# EAGLE board MatrixEscravo (EAGLE 6.5.0)
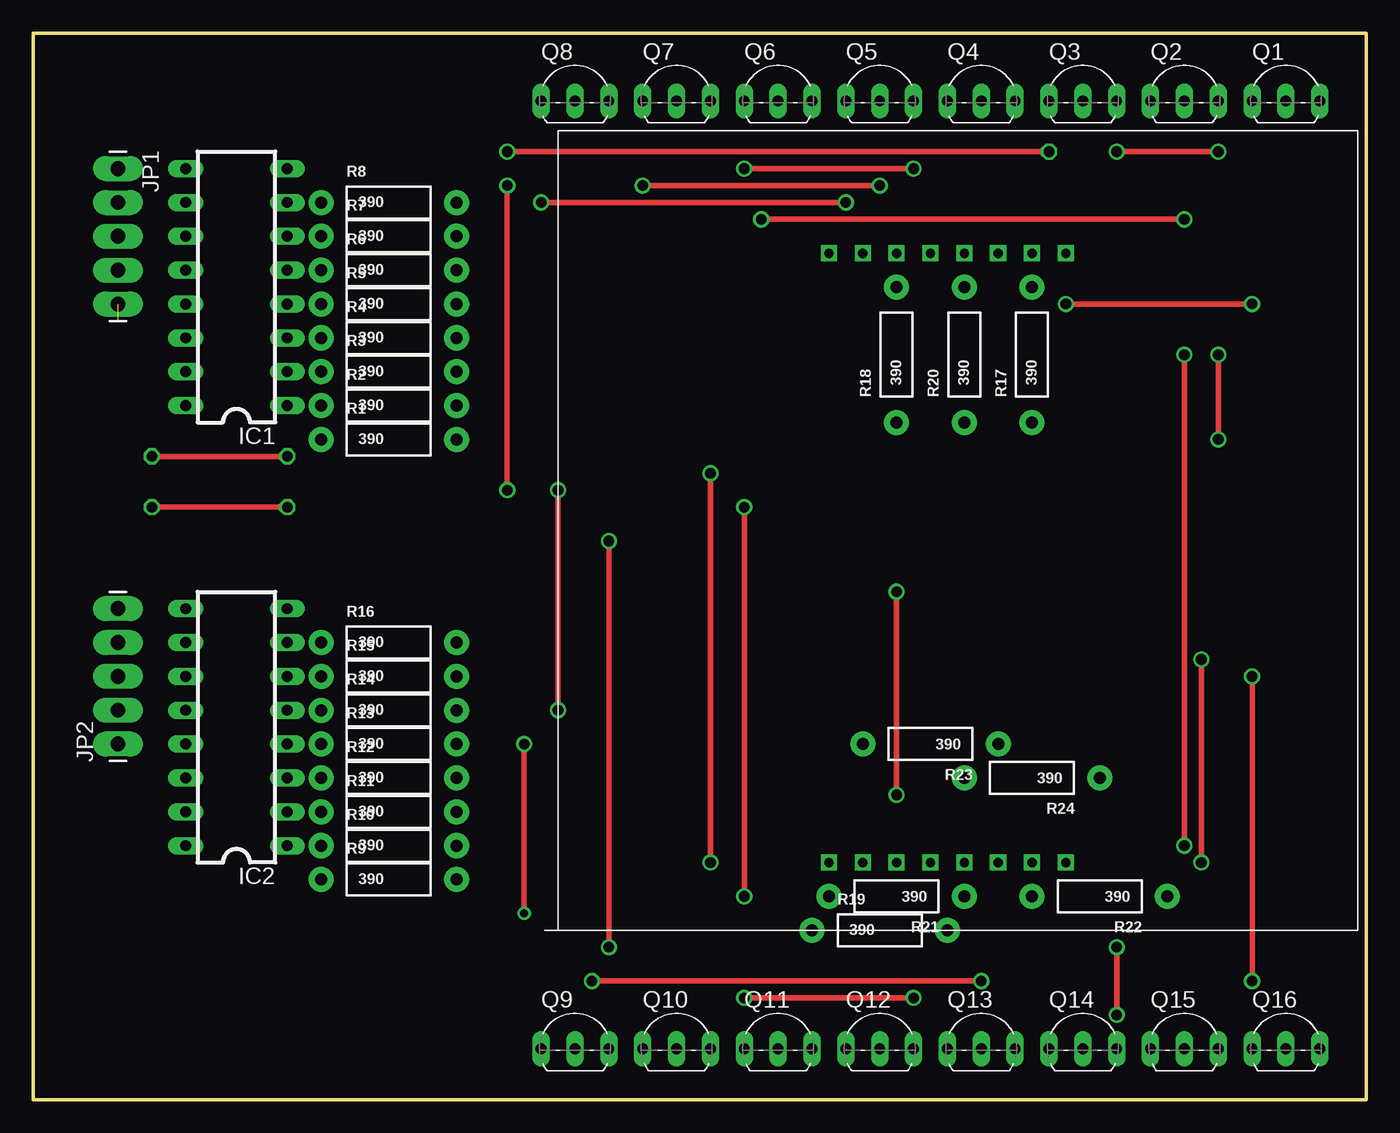
[diagram p0: board, top side]
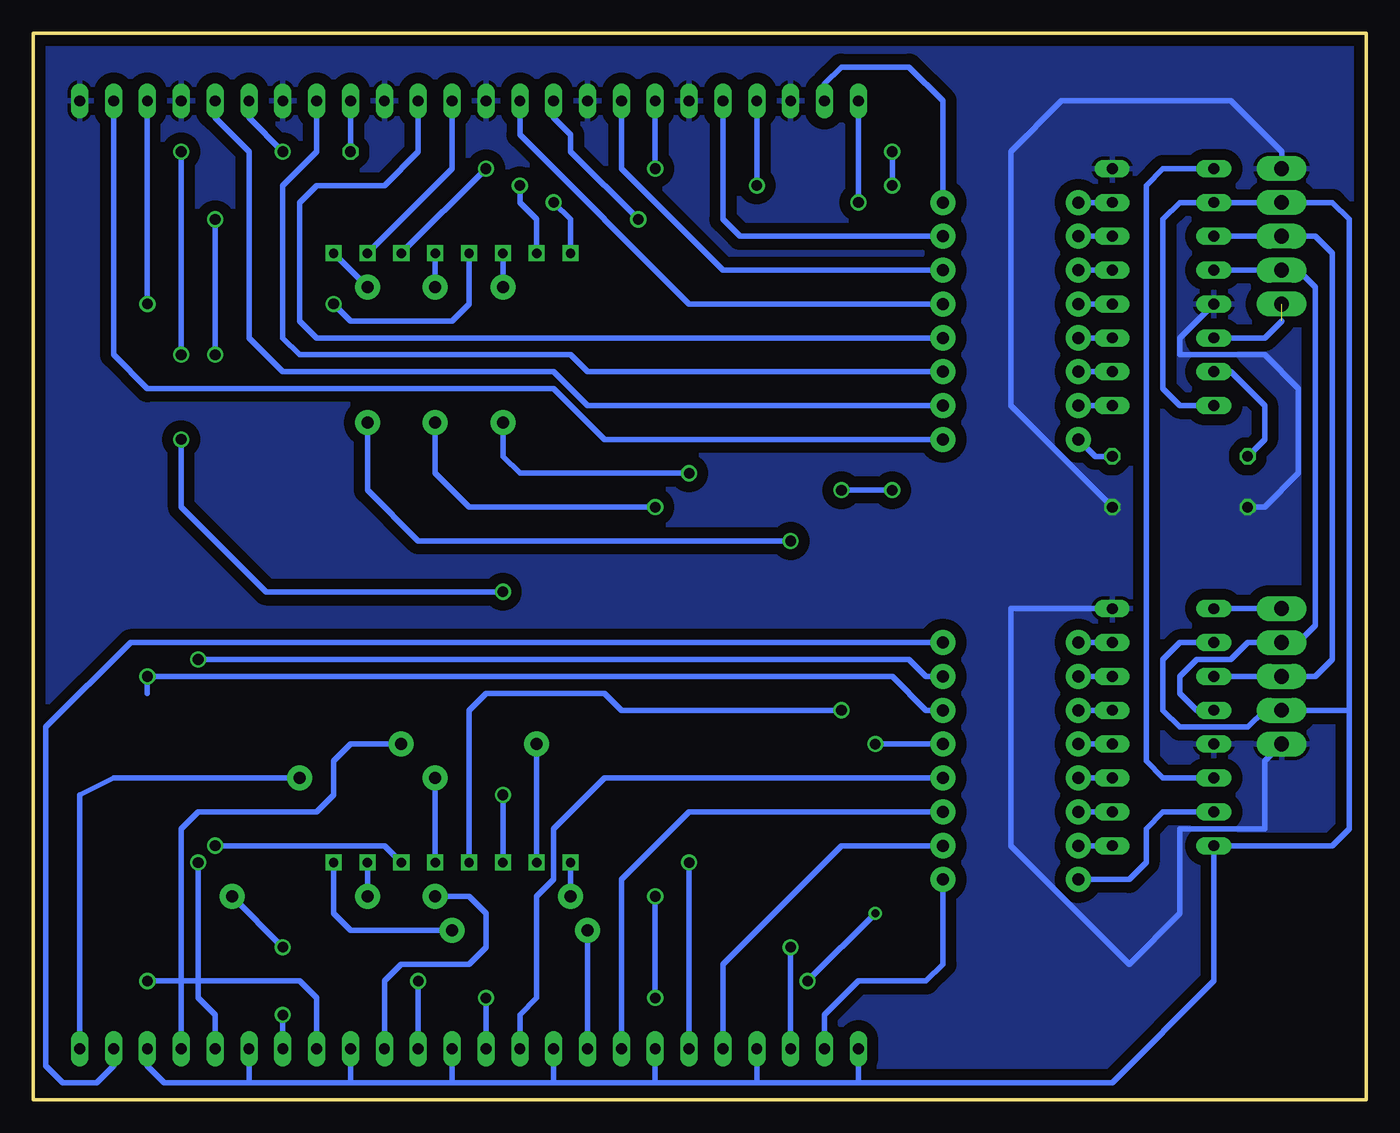
[diagram p1: board, bottom side, seen from below]

Size 100 x 80 mm. Coordinates in mm from the lower left corner, seen from the top.
Outline: 0,0 100,0 100,80 0,80 0,0
Copper layers (1*16): Top 0.035mm / dielectric 1.5mm / Bottom 0.035mm
Design rules "default *": minimum track width 10mil, minimum drill 24mil, track to track 8mil, track to pad 8mil, pad to pad 8mil, via to via 8mil, smd to smd 8mil, copper to edge 10mil, drill to drill 8mil, minimum pad ring 10mil, minimum via ring 8mil, stop-mask expansion 4mil, vias tented up to drill 0mil, thermal gap 10mil

## Footprints (pad centres in the part's own frame; a part is rotated, then mirrored left to right if it is on the bottom)
DIL16 = drill 0.813 long: 1 -8.89,-3.81; 2 -6.35,-3.81; 3 -3.81,-3.81; 4 -1.27,-3.81; 5 1.27,-3.81; 6 3.81,-3.81; 7 6.35,-3.81; 8 8.89,-3.81; 9 8.89,3.81; 10 6.35,3.81; 11 3.81,3.81; 12 1.27,3.81; 13 -1.27,3.81; 14 -3.81,3.81; 15 -6.35,3.81; 16 -8.89,3.81
1X05_LONGPADS = drill 1.118 pad 1.88 long: 1 0,0; 2 2.54,0; 3 5.08,0; 4 7.62,0; 5 10.16,0
TO92-EBC = drill 0.813 long: B 0,-1.27; C -2.54,-1.27; E 2.54,-1.27
AXIAL-0.4 = drill 0.9 pad 1.88: P$1 -5.08,0; P$2 5.08,0
HS2388 = drill 0.7 square: 1 20.32,5.08; 2 22.86,5.08; 3 25.4,5.08; 4 27.94,5.08; 5 30.48,5.08; 6 33.02,5.08; 7 35.56,5.08; 8 38.1,5.08; 9 38.1,50.8; 10 35.56,50.8; 11 33.02,50.8; 12 30.48,50.8; 13 27.94,50.8; 14 25.4,50.8; 15 22.86,50.8; 16 20.32,50.8

## Placement (x,y rotation side)
IC1  74LS595N  [DIL16]  15.24,60.96 90 top
IC2  74LS595N  [DIL16]  15.24,27.94 90 top
JP1  [1X05_LONGPADS]  6.35,69.85 270 top
JP2  [1X05_LONGPADS]  6.35,26.67 90 top
Q1  BC548  [TO92-EBC]  93.98,76.2 0 top
Q2  BC548  [TO92-EBC]  86.36,76.2 0 top
Q3  BC548  [TO92-EBC]  78.74,76.2 0 top
Q4  BC548  [TO92-EBC]  71.12,76.2 0 top
Q5  BC548  [TO92-EBC]  63.5,76.2 0 top
Q6  BC548  [TO92-EBC]  55.88,76.2 0 top
Q7  BC548  [TO92-EBC]  48.26,76.2 0 top
Q8  BC548  [TO92-EBC]  40.64,76.2 0 top
Q9  BC548  [TO92-EBC]  40.64,5.08 0 top
Q10  BC548  [TO92-EBC]  48.26,5.08 0 top
Q11  BC548  [TO92-EBC]  55.88,5.08 0 top
Q12  BC548  [TO92-EBC]  63.5,5.08 0 top
Q13  BC548  [TO92-EBC]  71.12,5.08 0 top
Q14  BC548  [TO92-EBC]  78.74,5.08 0 top
Q15  BC548  [TO92-EBC]  86.36,5.08 0 top
Q16  BC548  [TO92-EBC]  93.98,5.08 0 top
R1  390  [AXIAL-0.4]  26.67,49.53 0 top
R2  390  [AXIAL-0.4]  26.67,52.07 0 top
R3  390  [AXIAL-0.4]  26.67,54.61 0 top
R4  390  [AXIAL-0.4]  26.67,57.15 0 top
R5  390  [AXIAL-0.4]  26.67,59.69 0 top
R6  390  [AXIAL-0.4]  26.67,62.23 0 top
R7  390  [AXIAL-0.4]  26.67,64.77 0 top
R8  390  [AXIAL-0.4]  26.67,67.31 0 top
R9  390  [AXIAL-0.4]  26.67,16.51 0 top
R10  390  [AXIAL-0.4]  26.67,19.05 0 top
R11  390  [AXIAL-0.4]  26.67,21.59 0 top
R12  390  [AXIAL-0.4]  26.67,24.13 0 top
R13  390  [AXIAL-0.4]  26.67,26.67 0 top
R14  390  [AXIAL-0.4]  26.67,29.21 0 top
R15  390  [AXIAL-0.4]  26.67,31.75 0 top
R16  390  [AXIAL-0.4]  26.67,34.29 0 top
R17  390  [AXIAL-0.4]  74.93,55.88 90 top
R18  390  [AXIAL-0.4]  64.77,55.88 90 top
R19  390  [AXIAL-0.4]  63.5,12.7 0 top
R20  390  [AXIAL-0.4]  69.85,55.88 90 top
R21  390  [AXIAL-0.4]  64.77,15.24 180 top
R22  390  [AXIAL-0.4]  80.01,15.24 180 top
R23  390  [AXIAL-0.4]  67.31,26.67 180 top
R24  390  [AXIAL-0.4]  74.93,24.13 180 top
U$1  LEDMATRIX(HS2388)  [HS2388]  39.37,12.7 0 top

## Library data of the parts
IC1 IC2 JP1 JP2 R1-R24 = SparkFun
Q1-Q16 = transistor-npn
U$1 = HS2388

## Nets
CLOCK: IC1.11 IC2.11 JP1.3 JP2.3
GND: IC1.8 IC1.13 IC2.8 IC2.13 JP1.1 JP2.1 Q1.E Q2.E Q3.E Q4.E Q5.E Q6.E Q7.E Q8.E
LATCH: IC1.12 IC2.12 JP1.4 JP2.4
N$1: Q1.B R1.P$2
N$2: IC1.15 R1.P$1
N$3: Q8.B R8.P$2
N$4: IC1.1 R2.P$1
N$5: Q16.E R24.P$1
N$6: Q15.E R23.P$1
N$7: Q14.E R22.P$1
N$8: IC1.2 R3.P$1
N$9: IC1.3 R4.P$1
N$10: IC1.4 R5.P$1
N$11: IC1.5 R6.P$1
N$12: IC1.6 R7.P$1
N$13: IC1.7 R8.P$1
N$14: Q13.E R21.P$1
N$15: Q2.B R2.P$2
N$16: Q4.B R4.P$2
N$17: Q5.B R5.P$2
N$18: Q6.B R6.P$2
N$19: Q7.B R7.P$2
N$20: Q1.C U$1.13
N$21: Q2.C U$1.3
N$22: Q3.B R3.P$2
N$24: Q4.C U$1.10
N$25: Q5.C U$1.6
N$26: Q6.C U$1.11
N$27: Q7.C U$1.15
N$28: Q8.C U$1.16
N$29: Q12.E R20.P$1
N$30: Q11.E R19.P$1
N$31: Q10.E R18.P$1
N$32: Q9.E R17.P$1
N$33: R17.P$2 U$1.9
N$34: R18.P$2 U$1.14
N$35: R19.P$2 U$1.8
N$36: R20.P$2 U$1.12
N$37: R21.P$2 U$1.1
N$38: R22.P$2 U$1.7
N$39: R23.P$2 U$1.2
N$40: R24.P$2 U$1.5
N$41: Q9.B R9.P$2
N$42: Q10.B R10.P$2
N$43: Q11.B R11.P$2
N$44: Q12.B R12.P$2
N$45: Q13.B R13.P$2
N$46: Q14.B R14.P$2
N$47: Q15.B R15.P$2
N$48: Q16.B R16.P$2
N$49: IC2.15 R9.P$1
N$50: IC2.1 R10.P$1
N$51: IC2.2 R11.P$1
N$52: IC2.3 R12.P$1
N$53: IC2.4 R13.P$1
N$54: IC2.5 R14.P$1
N$55: IC2.6 R15.P$1
N$56: IC2.7 R16.P$1
N$57: IC1.9 IC2.14
N$59: Q3.C U$1.4
QH: IC2.9 JP2.5
QH.: IC1.14 JP1.5
VCC: IC1.10 IC1.16 IC2.10 IC2.16 JP1.2 JP2.2 Q9.C Q10.C Q11.C Q12.C Q13.C Q14.C Q15.C Q16.C

## Tracks (layer width: path | path; a pad name or v marks a point on that pad's centre or on a via)
CLOCK
  Bottom 0.406: IC1.11 JP1.3 3.81,64.77 2.54,63.5 2.54,33.02 3.81,31.75 JP2.3 IC2.11
GND  (via drill 0.8)
  Top 0.406: v19.05,44.45 v8.89,44.45
  Bottom 0.406: IC2.8 26.67,36.83 26.67,19.05 17.78,10.16 13.97,13.97 13.97,20.32 7.62,20.32 7.62,25.4 JP2.1 | JP1.1 6.35,71.12 10.16,74.93 22.86,74.93 26.67,71.12 26.67,52.07 v19.05,44.45 | v8.89,44.45 7.62,44.45 5.08,46.99 5.08,53.34 7.62,55.88 13.97,55.88 13.97,57.15 IC1.13
  pour Bottom (isolate 0.813): 0,80.01 100.33,80.01 100.33,0 0,0
LATCH
  Bottom 0.406: IC1.12 JP1.4 5.08,62.23 3.81,60.96 3.81,35.56 5.08,34.29 JP2.4 8.89,34.29 10.16,33.02 12.7,33.02 13.97,31.75 13.97,30.48 12.7,29.21 IC2.12
N$1
  Bottom 0.406: R1.P$2 57.15,49.53 60.96,53.34 91.44,53.34 93.98,55.88 Q1.B
N$2  (via drill 0.8)
  Top 0.406: v8.89,48.26 v19.05,48.26
  Bottom 0.406: IC1.15 10.16,54.61 7.62,52.07 7.62,49.53 v8.89,48.26 | v19.05,48.26 20.32,48.26 R1.P$1
N$3
  Bottom 0.406: Q8.B 40.64,76.2 39.37,77.47 34.29,77.47 31.75,74.93 R8.P$2
N$4
  Bottom 0.406: IC1.1 R2.P$1
N$5
  Bottom 0.406: R24.P$1 93.98,24.13 96.52,22.86 Q16.E
N$6
  Bottom 0.406: Q15.E 88.9,20.32 87.63,21.59 78.74,21.59 77.47,22.86 77.47,25.4 76.2,26.67 R23.P$1
N$7  (via drill 0.8)
  Top 0.406: v81.28,11.43 v81.28,6.35
  Bottom 0.406: R22.P$1 v81.28,11.43 | v81.28,6.35 Q14.E
N$8
  Bottom 0.406: R3.P$1 IC1.2
N$9
  Bottom 0.406: IC1.3 R4.P$1
N$10
  Bottom 0.406: R5.P$1 IC1.4
N$11
  Bottom 0.406: IC1.5 R6.P$1
N$12
  Bottom 0.406: R7.P$1 IC1.6
N$13
  Bottom 0.406: IC1.7 R8.P$1
N$14
  Bottom 0.406: R21.P$1 67.31,15.24 66.04,13.97 66.04,11.43 67.31,10.16 72.39,10.16 73.66,8.89 Q13.E
N$15
  Bottom 0.406: R2.P$2 58.42,52.07 60.96,54.61 81.28,54.61 83.82,57.15 83.82,71.12 86.36,73.66 Q2.B
N$16
  Bottom 0.406: R4.P$2 78.74,57.15 80.01,58.42 80.01,67.31 78.74,68.58 73.66,68.58 71.12,71.12 Q4.B
N$17
  Bottom 0.406: Q5.B 63.5,72.39 50.8,59.69 R5.P$2
N$18
  Bottom 0.406: Q6.B 55.88,69.85 48.26,62.23 R6.P$2
N$19
  Bottom 0.406: Q7.B 48.26,66.04 46.99,64.77 R7.P$2
N$20  (via drill 0.8)
  Top 0.406: v77.47,59.69 v91.44,59.69
  Bottom 0.406: U$1.13 67.31,59.69 68.58,58.42 76.2,58.42 v77.47,59.69 | v91.44,59.69 Q1.C
N$21  (via drill 0.8)
  Top 0.406: v81.28,71.12 v88.9,71.12 | v88.9,55.88 v88.9,49.53 | v64.77,38.1 v64.77,22.86
  Bottom 0.406: Q2.C 83.82,73.66 v81.28,71.12 | v88.9,71.12 v88.9,55.88 | v64.77,38.1 82.55,38.1 88.9,44.45 v88.9,49.53 | v64.77,22.86 U$1.3
N$22
  Bottom 0.406: R3.P$2 58.42,54.61 59.69,55.88 80.01,55.88 81.28,57.15 81.28,68.58 78.74,71.12 Q3.B
N$24
  Bottom 0.406: Q4.C 68.58,69.85 U$1.10
N$25  (via drill 0.8)
  Top 0.406: v54.61,66.04 v86.36,66.04 | v86.36,55.88 v86.36,19.05
  Bottom 0.406: Q5.C 60.96,73.66 59.69,72.39 59.69,71.12 v54.61,66.04 | v86.36,19.05 73.66,19.05 U$1.6 | v86.36,66.04 v86.36,55.88
N$26  (via drill 0.8)
  Top 0.406: v53.34,69.85 v66.04,69.85
  Bottom 0.406: Q6.C v53.34,69.85 | v66.04,69.85 U$1.11
N$27  (via drill 0.8)
  Top 0.406: v45.72,68.58 v63.5,68.58
  Bottom 0.406: Q7.C v45.72,68.58 | v63.5,68.58 63.5,67.31 62.23,66.04 U$1.15
N$28  (via drill 0.8)
  Top 0.406: v38.1,67.31 v60.96,67.31
  Bottom 0.406: Q8.C v38.1,67.31 | v60.96,67.31 59.69,66.04 U$1.16
N$29  (via drill 0.8)
  Top 0.406: v53.34,44.45 v53.34,15.24 | v53.34,7.62 v66.04,7.62
  Bottom 0.406: R20.P$1 69.85,46.99 67.31,44.45 v53.34,44.45 | v53.34,15.24 v53.34,7.62 | v66.04,7.62 Q12.E
N$30
  Bottom 0.406: Q11.E R19.P$1
N$31  (via drill 0.8)
  Top 0.406: v50.8,46.99 v50.8,17.78
  Bottom 0.406: R18.P$1 64.77,48.26 63.5,46.99 v50.8,46.99 | v50.8,17.78 Q10.E
N$32  (via drill 0.8)
  Top 0.406: v43.18,11.43 v43.18,41.91
  Bottom 0.406: Q9.E v43.18,11.43 | v43.18,41.91 71.12,41.91 74.93,45.72 R17.P$1
N$33
  Bottom 0.406: R17.P$2 U$1.9
N$34
  Bottom 0.406: R18.P$2 U$1.14
N$35
  Bottom 0.406: U$1.8 77.47,13.97 76.2,12.7 R19.P$2
N$36
  Bottom 0.406: R20.P$2 U$1.12
N$37
  Bottom 0.406: R21.P$2 U$1.1
N$38
  Bottom 0.406: R22.P$2 U$1.7
N$39
  Bottom 0.406: R23.P$2 U$1.2
N$40
  Bottom 0.406: R24.P$2 U$1.5
N$41
  Bottom 0.406: Q9.B 40.64,6.35 38.1,8.89 33.02,8.89 31.75,10.16 R9.P$2
N$42
  Bottom 0.406: R10.P$2 39.37,19.05 48.26,10.16 Q10.B
N$43
  Bottom 0.406: R11.P$2 50.8,21.59 55.88,16.51 Q11.B
N$44
  Bottom 0.406: R12.P$2 57.15,24.13 60.96,20.32 60.96,16.51 62.23,15.24 62.23,7.62 63.5,6.35 Q12.B
N$45  (via drill 0.6, 0.8)
  Top 0.406: v71.12,8.89 v41.91,8.89 | v36.83,13.97 v36.83,26.67
  Bottom 0.406: Q13.B v71.12,8.89 | v41.91,8.89 v36.83,13.97 | v36.83,26.67 R13.P$2
N$46  (via drill 0.8)
  Top 0.406: v91.44,31.75 v91.44,8.89
  Bottom 0.406: R14.P$2 33.02,29.21 35.56,31.75 v91.44,31.75 91.44,30.48 | v91.44,8.89 80.01,8.89 78.74,7.62 Q14.B
N$47  (via drill 0.8)
  Top 0.406: v87.63,33.02 v87.63,17.78
  Bottom 0.406: v87.63,17.78 87.63,7.62 86.36,6.35 Q15.B | R15.P$2 33.02,31.75 34.29,33.02 v87.63,33.02
N$48
  Bottom 0.406: R16.P$2 92.71,34.29 99.06,27.94 99.06,2.54 97.79,1.27 95.25,1.27 93.98,2.54 Q16.B
N$49
  Bottom 0.406: IC2.15 15.24,21.59 16.51,20.32 16.51,17.78 17.78,16.51 R9.P$1
N$50
  Bottom 0.406: IC2.1 R10.P$1
N$51
  Bottom 0.406: IC2.2 R11.P$1
N$52
  Bottom 0.406: IC2.3 R12.P$1
N$53
  Bottom 0.406: IC2.4 R13.P$1
N$54
  Bottom 0.406: IC2.5 R14.P$1
N$55
  Bottom 0.406: IC2.6 R15.P$1
N$56
  Bottom 0.406: IC2.7 R16.P$1
N$57
  Bottom 0.406: IC1.9 15.24,69.85 16.51,68.58 16.51,25.4 15.24,24.13 IC2.14
N$59  (via drill 0.8)
  Top 0.406: v76.2,71.12 v35.56,71.12 | v35.56,68.58 v35.56,45.72 | v39.37,45.72 v39.37,29.21
  Bottom 0.406: Q3.C v76.2,71.12 | v35.56,71.12 v35.56,68.58 | v35.56,45.72 v39.37,45.72 | v39.37,29.21 55.88,29.21 57.15,30.48 66.04,30.48 67.31,29.21 U$1.4
QH
  Bottom 0.406: JP2.5 IC2.9
QH.  (1 unrouted)
  Bottom 0.406: 6.35,58.42 7.62,57.15 IC1.14
VCC
  Bottom 0.406: IC1.16 13.97,52.07 15.24,53.34 15.24,66.04 13.97,67.31 IC1.10 JP1.2 2.54,67.31 1.27,66.04 1.27,29.21 | 1.27,29.21 1.27,20.32 2.54,19.05 IC2.16 11.43,8.89 19.05,1.27 38.1,1.27 | IC2.10 13.97,34.29 15.24,33.02 15.24,29.21 13.97,27.94 8.89,27.94 7.62,29.21 JP2.2 1.27,29.21 | 38.1,1.27 45.72,1.27 | 45.72,1.27 53.34,1.27 | 53.34,1.27 60.96,1.27 | 60.96,1.27 68.58,1.27 | 68.58,1.27 76.2,1.27 | 76.2,1.27 83.82,1.27 | 83.82,1.27 90.17,1.27 91.44,2.54 Q16.C | Q10.C 45.72,1.27 | Q9.C 38.1,1.27 | Q11.C 53.34,1.27 | Q12.C 60.96,1.27 | Q13.C 68.58,1.27 | Q14.C 76.2,1.27 | Q15.C 83.82,1.27